# Altium PCB SPI-主板-开关.PcbDoc (part 8 of 11)
Units mm, origin at the board's own origin, x right, y up, seen from the top; angles counter-clockwise.
Board outline 97.69 x 103.45 mm, 2 copper layers (Top Layer, Bottom Layer); 86 components, 63 nets, 260 pads, 250 vias.
Unrouted connection lines stored in the file: 6.
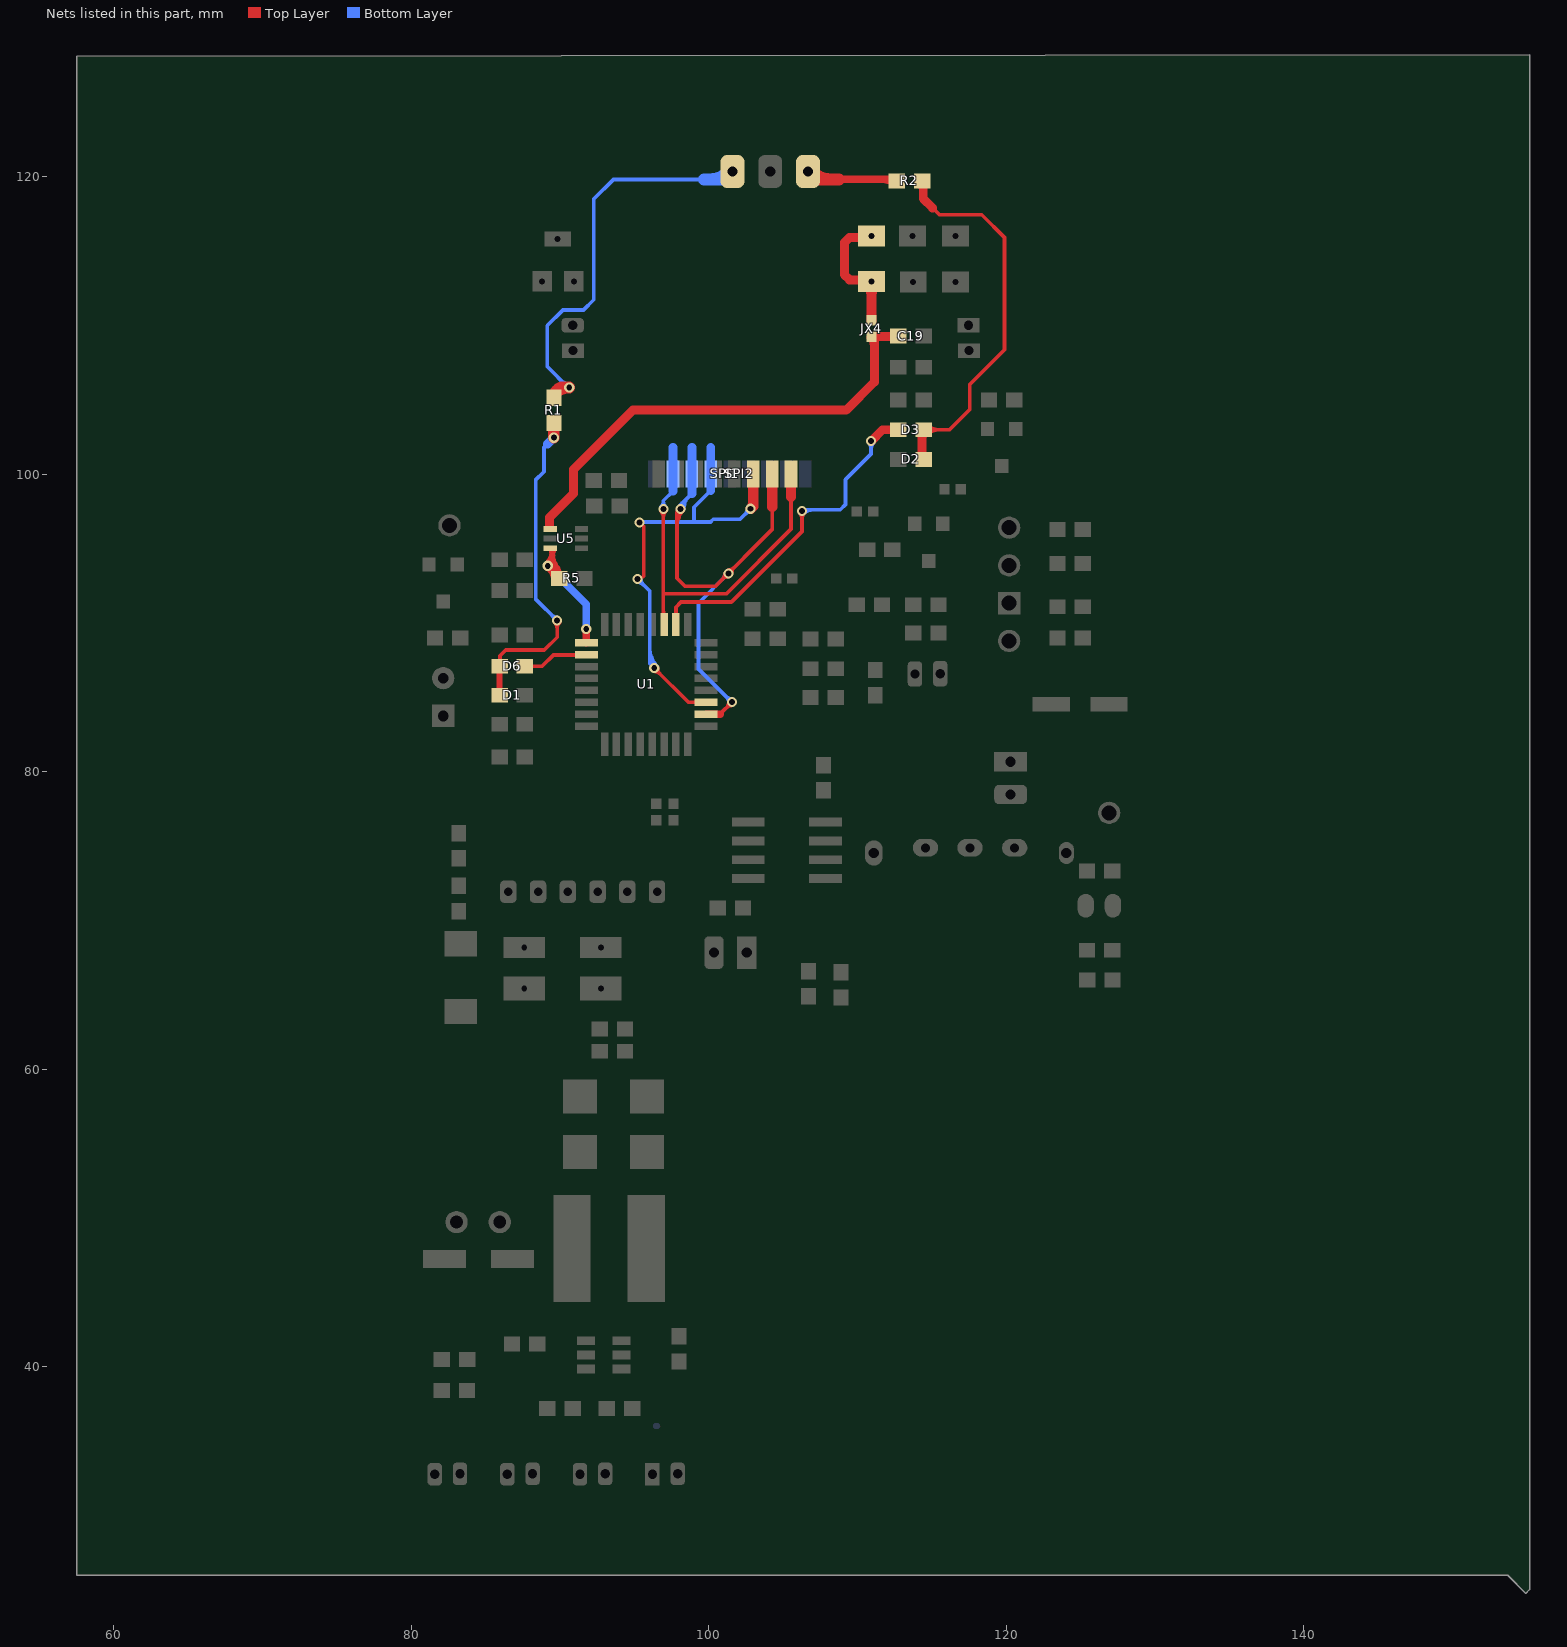
[diagram p8: the nets of this part, all layers, seen from the top]

## Via types
v1: diameter 0.9, hole 0.5, Top Layer to Bottom Layer, 104 vias
v2: diameter 0.68, hole 0.4, Top Layer to Bottom Layer, 100 vias
v3: diameter 1.1, hole 0.6, Top Layer to Bottom Layer, tented both sides, 16 vias
v4: diameter 1, hole 0.8, Top Layer to Bottom Layer, tented both sides, 8 vias
v5: diameter 1, hole 0.6, Top Layer to Bottom Layer, 4 vias
v6: diameter 0.8, hole 0.5, Top Layer to Bottom Layer, 4 vias
v7: diameter 0.7, hole 0.4, Top Layer to Bottom Layer, 4 vias
v8: diameter 0.6, hole 0.4, Top Layer to Bottom Layer, 3 vias
v9: diameter 1.1, hole 0.68, Top Layer to Bottom Layer, 2 vias
v10: diameter 0.8, hole 0.4, Top Layer to Bottom Layer, 2 vias
v11: diameter 1, hole 0.5, Top Layer to Bottom Layer, 1 vias
v12: diameter 0.9, hole 0.6, Top Layer to Bottom Layer, tented bottom, 1 vias
v13: diameter 1.2, hole 0.68, Top Layer to Bottom Layer, 1 vias

## Nets (pads, with @x,y where several pads share a name; then routed paths per layer and width w, separated by ;. In a path a pad name is that pad's centre, name@x,y a point inside that pad or via, vN(x,y) a via of type N, cw(c..) or ccw(c..) an arc to the next point about the centre after c; other vN are vias at no path point) (continued)
HWKZ: R5.2 U1.17 U5.6 | length 146.2
  Top Layer w0.254: v2@89.124,93.647 cw(c88.981,93.113) R5.2@89.46,93.389 ; v2@89.146,93.83 ccw(c89.618,94.154) 89.527,93.589 ; v2@89.194,93.64 cw(c89.206,93.452) 89.369,93.547 cw(c89.551,93.652) v2@89.367,93.752 ; v2@89.288,93.561 ccw(c89.693,93.84) R5.2@89.811,93.362 ; U5.6@89.35,95.032 U5.6@89.51,95.032 ; v2@89.371,93.76 ccw(c89.548,93.674) 89.45,93.504 ; v2@89.381,93.784 ccw(c89.663,93.688) R5.2@89.517,93.428 ; v2@89.383,93.789 ccw(c89.75,93.673) R5.2@89.5,93.379 ; v2@89.385,93.798 ccw(c89.844,93.675) R5.2@89.433,93.437 ; v2@89.392,93.872 ccw(c90.072,93.934) R5.2@89.731,93.342 ; R5.2@89.51,93.06 89.51,93.523 U5.6@89.51,95.032 ; R5.2@89.531,93.054 ccw(c88.953,93.139) 89.366,93.552 ccw(c89.809,93.995) R5.2@89.866,93.371 ; 89.538,93.566 cw(c89.345,93.152) R5.2@89.785,93.032 ; U5.6@89.55,94.991 cw(c89.367,94.855) 89.581,94.777 ; 89.561,93.538 cw(c89.325,93.13) R5.2@89.784,93.026 ; v2@89.041,94.015 ccw(c88.172,95.032) U5.6@89.51,95.032 ; v2@89.041,94.015 ccw(c88.172,95.032) U5.6@89.51,95.032 ; v2@89.041,94.015 ccw(c88.172,95.032) U5.6@89.51,95.032 ; v2@89.088,93.661 cw(c88.771,92.994) R5.2@89.51,92.994 ; v2@89.088,93.661 cw(c88.771,92.994) R5.2@89.51,92.994 ; v2@89.088,93.661 cw(c88.771,92.994) R5.2@89.51,92.994 ; v2@89.127,93.647 cw(c88.973,93.044) R5.2@89.574,93.205 ; v2@89.127,93.647 cw(c88.973,93.044) R5.2@89.574,93.205 ; v2@89.127,93.647 cw(c88.973,93.044) R5.2@89.574,93.205 ; v2@89.127,93.647 cw(c88.973,93.044) R5.2@89.574,93.205 ; v2@89.127,93.647 cw(c88.973,93.044) R5.2@89.574,93.205 ; v2@89.131,93.646 cw(c88.933,92.801) R5.2@89.684,93.235 ; v2@89.131,93.646 cw(c88.933,92.801) R5.2@89.684,93.235 ; v2@89.131,93.646 cw(c88.933,92.801) R5.2@89.684,93.235 ; v2@89.131,93.646 cw(c88.933,92.801) R5.2@89.684,93.235 ; v2@89.137,93.644 cw(c89.011,93.021) R5.2@89.625,93.185 ; v2@89.137,93.644 cw(c89.011,93.021) R5.2@89.625,93.185 ; v2@89.137,93.644 cw(c89.011,93.021) R5.2@89.625,93.185 ; v2@89.137,93.644 cw(c89.011,93.021) R5.2@89.625,93.185 ; v2@89.137,93.644 cw(c89.011,93.021) R5.2@89.625,93.185 ; v2@89.137,93.644 cw(c89.011,93.021) R5.2@89.625,93.185 ; v2@89.188,93.893 cw(c89.102,93.47) 89.519,93.582 ; v2@89.188,93.893 cw(c89.102,93.47) 89.519,93.582 ; v2@89.188,93.893 cw(c89.102,93.47) 89.519,93.582 ; v2@89.188,93.893 cw(c89.102,93.47) 89.519,93.582 ; v2@89.188,93.893 cw(c89.102,93.47) 89.519,93.582 ; v2@89.188,93.893 cw(c89.102,93.47) 89.519,93.582 ; v2@89.19,93.893 cw(c89.096,93.526) 89.462,93.624 ; v2@89.19,93.893 cw(c89.096,93.526) 89.462,93.624 ; v2@89.19,93.893 cw(c89.096,93.526) 89.462,93.624 ; v2@89.19,93.893 cw(c89.096,93.526) 89.462,93.624 ; v2@89.19,93.893 cw(c89.096,93.526) 89.462,93.624 ; v2@89.19,94.066 ccw(c89.205,94.385) 89.469,94.204 ; v2@89.19,94.066 ccw(c89.205,94.385) 89.469,94.204 ; v2@89.19,94.066 ccw(c89.205,94.385) 89.469,94.204 ; v2@89.192,93.892 cw(c88.916,93.013) R5.2@89.789,93.308 ; v2@89.192,93.892 cw(c88.916,93.013) R5.2@89.789,93.308 ; v2@89.192,93.892 cw(c88.916,93.013) R5.2@89.789,93.308 ; v2@89.192,93.892 cw(c88.916,93.013) R5.2@89.789,93.308 ; v2@89.192,93.892 cw(c88.916,93.013) R5.2@89.789,93.308 ; v2@89.192,93.892 cw(c88.916,93.013) R5.2@89.789,93.308 ; v2@89.197,93.89 cw(c88.962,93.395) R5.2@89.51,93.395 ; v2@89.197,93.89 cw(c88.962,93.395) R5.2@89.51,93.395 ; v2@89.197,93.89 cw(c88.962,93.395) R5.2@89.51,93.395 ; v2@89.2,93.889 cw(c88.809,93.212) R5.2@89.564,93.414 ; v2@89.2,93.889 cw(c88.809,93.212) R5.2@89.564,93.414 ; v2@89.2,93.889 cw(c88.809,93.212) R5.2@89.564,93.414 ; v2@89.2,93.889 cw(c88.885,93.343) 89.494,93.506 ; v2@89.2,93.889 cw(c88.809,93.212) R5.2@89.564,93.414 ; v2@89.2,93.889 cw(c88.809,93.212) R5.2@89.564,93.414 ; v2@89.2,93.889 cw(c88.885,93.343) 89.494,93.506 ; v2@89.2,93.889 cw(c88.809,93.212) R5.2@89.564,93.414 ; v2@89.2,93.889 cw(c88.885,93.343) 89.494,93.506 ; v2@89.2,93.889 cw(c88.885,93.343) 89.494,93.506 ; v2@89.2,93.889 cw(c88.885,93.343) 89.494,93.506 ; v2@89.201,93.641 cw(c89.26,93.067) R5.2@89.669,93.475 ; v2@89.201,93.641 cw(c89.26,93.067) R5.2@89.669,93.475 ; v2@89.201,93.641 cw(c89.26,93.067) R5.2@89.669,93.475 ; v2@89.201,93.641 cw(c89.26,93.067) R5.2@89.669,93.475 ; v2@89.201,93.641 cw(c89.26,93.067) R5.2@89.669,93.475 ; v2@89.206,93.822 ccw(c88.643,94.481) 89.51,94.481 ; v2@89.206,93.822 ccw(c88.643,94.481) 89.51,94.481 ; v2@89.206,93.822 ccw(c88.643,94.481) 89.51,94.481 ; v2@89.254,93.653 cw(c89.33,93.447) 89.486,93.603 ; v2@89.254,93.653 cw(c89.33,93.447) 89.486,93.603 ; v2@89.254,93.653 cw(c89.33,93.447) 89.486,93.603 ; v2@89.254,93.653 cw(c89.33,93.447) 89.486,93.603 ; v2@89.268,94.134 cw(c89.101,93.603) 89.628,93.782 ; v2@89.268,94.134 cw(c89.101,93.603) 89.628,93.782 ; v2@89.268,94.134 cw(c89.101,93.603) 89.628,93.782 ; v2@89.268,94.134 cw(c89.101,93.603) 89.628,93.782 ; v2@89.268,94.134 cw(c89.101,93.603) 89.628,93.782 ; v2@89.268,94.134 cw(c89.101,93.603) 89.628,93.782 ; v2@89.274,93.662 cw(c89.412,93.384) 89.579,93.646 ; v2@89.274,93.662 cw(c89.412,93.384) 89.579,93.646 ; v2@89.274,93.662 cw(c89.412,93.384) 89.579,93.646 ; v2@89.274,93.662 cw(c89.412,93.384) 89.579,93.646 ; U5.6@89.302,94.984 cw(c89.039,94.718) 89.4,94.622 ; U5.6@89.302,94.984 cw(c89.039,94.718) 89.4,94.622 ; U5.6@89.302,94.984 cw(c89.039,94.718) 89.4,94.622 ; v2@89.337,93.806 ccw(c90.122,94.259) R5.2@89.965,93.367 ; v2@89.337,93.806 ccw(c90.122,94.259) R5.2@89.965,93.367 ; v2@89.337,93.806 ccw(c90.122,94.259) R5.2@89.965,93.367 ; v2@89.337,93.806 ccw(c90.122,94.259) R5.2@89.965,93.367 ; v2@89.357,93.735 ccw(c89.573,93.59) R5.2@89.404,93.391 ; v2@89.357,93.735 ccw(c89.573,93.59) R5.2@89.404,93.391 ; v2@89.357,93.735 ccw(c89.573,93.59) R5.2@89.404,93.391 ; v2@89.365,93.958 cw(c89.825,94.22) 89.388,94.52 ; v2@89.365,93.958 cw(c89.825,94.22) 89.388,94.52 ; v2@89.365,93.958 cw(c89.825,94.22) 89.388,94.52 ; v2@89.387,93.899 ccw(c89.757,93.982) 89.554,93.662 ; v2@89.387,93.899 ccw(c89.757,93.982) 89.554,93.662 ; v2@89.387,93.899 ccw(c89.757,93.982) 89.554,93.662 ; v2@89.387,93.899 ccw(c89.757,93.982) 89.554,93.662 ; v2@89.389,93.892 cw(c89.761,93.961) 89.449,94.176 ; v2@89.389,93.892 cw(c89.761,93.961) 89.449,94.176 ; v2@89.389,93.892 cw(c89.761,93.961) 89.449,94.176 ; v2@89.392,93.844 ccw(c89.713,93.829) 89.486,93.603 ; v2@89.392,93.844 ccw(c89.713,93.829) 89.486,93.603 ; v2@89.392,93.844 ccw(c89.713,93.829) 89.486,93.603 ; v2@89.392,93.844 ccw(c89.713,93.829) 89.486,93.603 ; v2@89.439,93.658 ccw(c90.214,93.866) R5.2@89.941,93.112 ; v2@89.439,93.658 ccw(c90.214,93.866) R5.2@89.941,93.112 ; v2@89.439,93.658 ccw(c90.214,93.866) R5.2@89.941,93.112 ; 89.478,93.562 cw(c88.947,93.255) R5.2@89.54,93.097 ; 89.478,93.562 cw(c88.947,93.255) R5.2@89.54,93.097 ; 89.478,93.562 cw(c88.947,93.255) R5.2@89.54,93.097 ; 89.478,93.562 cw(c88.947,93.255) R5.2@89.54,93.097 ; 89.51,93.617 ccw(c90.517,93.617) R5.2@89.805,92.905 ; 89.51,93.617 ccw(c90.517,93.617) R5.2@89.805,92.905 ; 89.51,93.617 ccw(c90.517,93.617) R5.2@89.805,92.905 ; 89.51,94.23 ccw(c91.13,94.23) R5.2@89.984,93.084 ; 89.51,94.23 ccw(c91.13,94.23) R5.2@89.984,93.084 ; 89.51,94.23 ccw(c91.13,94.23) R5.2@89.984,93.084 ; 89.51,94.638 cw(c89.998,94.638) U5.6@89.653,94.984 ; 89.51,94.638 cw(c89.998,94.638) U5.6@89.653,94.984 ; 89.51,94.638 cw(c89.998,94.638) U5.6@89.653,94.984 ; U5.6@89.51,94.843 ccw(c91.743,94.843) R5.2@90.164,93.264 ; U5.6@89.51,94.843 ccw(c91.743,94.843) R5.2@90.164,93.264 ; U5.6@89.51,94.843 ccw(c91.743,94.843) R5.2@90.164,93.264 ; 89.542,93.678 cw(c89.129,93.402) R5.2@89.569,93.172 ; 89.542,93.678 cw(c89.129,93.402) R5.2@89.569,93.172 ; 89.542,93.678 cw(c89.129,93.402) R5.2@89.569,93.172 ; 89.542,93.678 cw(c89.129,93.402) R5.2@89.569,93.172 ; 89.545,94.798 ccw(c89.371,94.898) U5.6@89.546,94.998 ; 89.545,94.798 ccw(c89.371,94.898) U5.6@89.546,94.998 ; 89.545,94.798 ccw(c89.371,94.898) U5.6@89.546,94.998 ; 89.561,94.549 cw(c90.147,94.651) U5.6@89.66,94.993 ; 89.561,94.549 cw(c90.147,94.651) U5.6@89.66,94.993 ; 89.561,94.549 cw(c90.147,94.651) U5.6@89.66,94.993 ; 89.571,93.635 ccw(c90.097,93.987) R5.2@89.973,93.366 ; 89.571,93.635 ccw(c90.097,93.987) R5.2@89.973,93.366 ; 89.571,93.635 ccw(c90.097,93.987) R5.2@89.973,93.366 ; 89.571,93.635 ccw(c90.097,93.987) R5.2@89.973,93.366 ; R5.2@89.586,93.201 ccw(c89.137,93.487) 89.598,93.753 ; R5.2@89.586,93.201 ccw(c89.137,93.487) 89.598,93.753 ; R5.2@89.586,93.201 ccw(c89.137,93.487) 89.598,93.753 ; R5.2@89.627,93.255 ccw(c89.16,93.691) 89.708,94.021 ; R5.2@89.627,93.255 ccw(c89.16,93.691) 89.708,94.021 ; R5.2@89.627,93.255 ccw(c89.16,93.691) 89.708,94.021 ; 89.688,93.597 ccw(c90.128,93.851) R5.2@89.997,93.36 ; 89.688,93.597 ccw(c90.128,93.851) R5.2@89.997,93.36 ; 89.688,93.597 ccw(c90.128,93.851) R5.2@89.997,93.36 ; R5.2@89.813,93.081 ccw(c89.416,93.452) 89.881,93.732 ; R5.2@89.813,93.081 ccw(c89.416,93.452) 89.881,93.732 ; R5.2@89.813,93.081 ccw(c89.416,93.452) 89.881,93.732
  Top Layer w0.5: v2@89.154,93.853 v2(89.179,93.853) 89.51,93.523 ; R5.2@89.95,93 89.95,93.082 89.51,93.523 ; v2(91.77,89.611) U1.17@91.775,88.677 ; v2@89.156,93.766 cw(c88.993,93.158) R5.2@89.539,93.473 ; v2@89.156,93.766 cw(c88.993,93.158) R5.2@89.539,93.473 ; v2@89.156,93.766 cw(c89.035,93.314) 89.44,93.548 ; v2@89.156,93.766 cw(c88.993,93.158) R5.2@89.539,93.473 ; v2@89.156,93.766 cw(c88.993,93.158) R5.2@89.539,93.473 ; v2@89.156,93.766 cw(c88.993,93.158) R5.2@89.539,93.473 ; v2@89.156,93.766 cw(c88.993,93.158) R5.2@89.539,93.473 ; v2@89.156,93.766 cw(c89.035,93.314) 89.44,93.548 ; v2@89.156,93.766 cw(c88.993,93.158) R5.2@89.539,93.473 ; v2@89.156,93.766 cw(c88.993,93.158) R5.2@89.539,93.473 ; v2@89.156,93.766 cw(c88.993,93.158) R5.2@89.539,93.473 ; v2@89.156,93.766 cw(c88.993,93.158) R5.2@89.539,93.473 ; v2@89.156,93.766 cw(c89.035,93.314) 89.44,93.548 ; v2@89.156,93.766 cw(c88.993,93.158) R5.2@89.539,93.473 ; v2@89.156,93.766 cw(c88.993,93.158) R5.2@89.539,93.473 ; v2@89.156,93.766 cw(c89.04,93.331) 89.429,93.556 ; v2@89.156,93.766 cw(c89.04,93.331) 89.429,93.556 ; v2@89.156,93.766 cw(c89.04,93.331) 89.429,93.556 ; v2@89.156,93.766 cw(c89.04,93.331) 89.429,93.556 ; v2@89.156,93.766 cw(c88.993,93.158) R5.2@89.539,93.473 ; v2@89.156,93.766 cw(c88.993,93.158) R5.2@89.539,93.473 ; v2@89.156,93.766 cw(c89.035,93.314) 89.44,93.548 ; v2@89.156,93.766 cw(c88.993,93.158) R5.2@89.539,93.473 ; v2@89.156,93.766 cw(c88.993,93.158) R5.2@89.539,93.473 ; v2@89.156,93.766 cw(c88.993,93.158) R5.2@89.539,93.473 ; v2@89.156,93.766 cw(c88.993,93.158) R5.2@89.539,93.473 ; v2@89.156,93.766 cw(c89.035,93.314) 89.44,93.548 ; v2@89.156,93.766 cw(c88.993,93.158) R5.2@89.539,93.473 ; v2@89.156,93.766 cw(c88.993,93.158) R5.2@89.539,93.473 ; v2@89.156,93.766 cw(c89.04,93.331) 89.429,93.556 ; v2@89.156,93.766 cw(c89.04,93.331) 89.429,93.556 ; v2@89.156,93.766 cw(c89.04,93.331) 89.429,93.556 ; v2@89.156,93.766 cw(c89.04,93.331) 89.429,93.556 ; v2@89.156,93.766 cw(c88.993,93.158) R5.2@89.539,93.473 ; v2@89.156,93.766 cw(c88.993,93.158) R5.2@89.539,93.473 ; v2@89.156,93.766 cw(c89.035,93.314) 89.44,93.548 ; v2@89.156,93.766 cw(c88.993,93.158) R5.2@89.539,93.473 ; v2@89.156,93.766 cw(c88.993,93.158) R5.2@89.539,93.473 ; v2@89.156,93.766 cw(c89.04,93.331) 89.429,93.556 ; v2@89.156,93.766 cw(c89.04,93.331) 89.429,93.556 ; v2@89.156,93.766 cw(c89.04,93.331) 89.429,93.556 ; v2@89.156,93.766 cw(c89.04,93.331) 89.429,93.556 ; v2@89.156,93.766 cw(c89.04,93.331) 89.429,93.556 ; v2@89.156,93.766 cw(c89.04,93.331) 89.429,93.556 ; v2@89.156,93.766 cw(c89.04,93.331) 89.429,93.556 ; v2@89.156,93.766 cw(c89.04,93.331) 89.429,93.556 ; v2@89.156,93.766 cw(c89.04,93.331) 89.429,93.556 ; v2@89.156,93.766 cw(c89.04,93.331) 89.429,93.556 ; v2@89.156,93.766 cw(c89.04,93.331) 89.429,93.556 ; v2@89.156,93.766 cw(c89.04,93.331) 89.429,93.556 ; v2@89.267,93.872 ccw(c89.707,93.967) 89.482,93.578 ; v2@89.267,93.872 ccw(c89.707,93.967) 89.482,93.578 ; v2@89.267,93.872 ccw(c89.707,93.967) 89.482,93.578 ; v2@89.267,93.872 ccw(c89.707,93.967) 89.482,93.578 ; v2@89.267,93.872 ccw(c89.707,93.967) 89.482,93.578 ; v2@89.267,93.872 ccw(c89.707,93.967) 89.482,93.578 ; v2@89.267,93.872 ccw(c89.707,93.967) 89.482,93.578 ; v2@89.267,93.872 ccw(c89.707,93.967) 89.482,93.578 ; v2@89.267,93.872 ccw(c89.707,93.967) 89.482,93.578 ; v2@89.267,93.872 ccw(c89.707,93.967) 89.482,93.578 ; v2@89.267,93.872 ccw(c89.707,93.967) 89.482,93.578 ; v2@89.267,93.872 ccw(c89.707,93.967) 89.482,93.578 ; v2@89.267,93.872 ccw(c89.707,93.967) 89.482,93.578 ; v2@89.267,93.872 ccw(c89.707,93.967) 89.482,93.578 ; v2@89.267,93.872 ccw(c89.707,93.967) 89.482,93.578 ; v2@89.267,93.872 ccw(c89.707,93.967) 89.482,93.578 ; v2@89.38,93.653 cw(c88.727,93) R5.2@89.65,93 ; v2@89.38,93.653 cw(c88.727,93) R5.2@89.65,93 ; v2@89.38,93.653 cw(c88.727,93) R5.2@89.65,93 ; v2@89.395,93.617 cw(c88.778,93) R5.2@89.65,93 ; v2@89.395,93.617 cw(c88.778,93) R5.2@89.65,93 ; v2@89.395,93.617 cw(c88.778,93) R5.2@89.65,93 ; v2@89.395,93.617 cw(c88.778,93) R5.2@89.65,93 ; v2@89.395,93.617 cw(c88.778,93) R5.2@89.65,93 ; v2@89.395,93.617 cw(c88.778,93) R5.2@89.65,93 ; v2@89.395,93.617 cw(c88.778,93) R5.2@89.65,93 ; v2@89.395,93.617 cw(c88.778,93) R5.2@89.65,93 ; v2@89.395,93.617 cw(c88.778,93) R5.2@89.65,93 ; v2@89.395,93.617 cw(c88.778,93) R5.2@89.65,93 ; v2@89.395,93.617 cw(c88.778,93) R5.2@89.65,93 ; v2@89.395,93.617 cw(c88.778,93) R5.2@89.65,93 ; v2@89.395,93.617 cw(c88.778,93) R5.2@89.65,93 ; v2@89.395,93.617 cw(c88.778,93) R5.2@89.65,93 ; v2@89.395,93.617 cw(c88.778,93) R5.2@89.65,93 ; v2@89.395,93.617 cw(c88.778,93) R5.2@89.65,93 ; 89.51,93.523 cw(c89.136,93.149) R5.2@89.655,93.048 ; 89.51,93.523 cw(c89.136,93.149) R5.2@89.655,93.048 ; 89.51,93.523 cw(c89.136,93.149) R5.2@89.655,93.048 ; 89.51,93.523 cw(c89.136,93.149) R5.2@89.655,93.048 ; 89.51,93.523 cw(c89.136,93.149) R5.2@89.655,93.048 ; 89.51,93.523 cw(c89.136,93.149) R5.2@89.655,93.048
  Bottom Layer w0.5: v2(89.179,93.853) 91.77,91.262 v2(91.77,89.611)
HWPOW: C19.2 JX4.1 JX4.2 pad.0@110.95,112.956 pad.0@110.95,116.032 U5.4 | length 47.8
  Top Layer w0.6: U5.4@89.306,96.443 89.306,97.104 90.907,98.704 90.907,100.32 94.904,104.318 109.245,104.318 111.136,106.209 111.136,109.271 C19.2@112.75,109.271 ; pad.0@110.95,112.956 110.837,113.069 109.478,113.069 109.124,113.423 109.124,115.583 109.478,115.937 110.855,115.937 pad.0@110.95,116.032 ; JX4.1@110.912,109.214 cw(c110.37,108.673) 111.136,108.673 ; JX4.1@110.912,109.214 cw(c110.37,108.673) 111.136,108.673 ; JX4.1@110.912,109.214 cw(c110.37,108.673) 111.136,108.673 ; 112.147,109.271 ccw(c112.147,109.853) C19.2@112.559,109.441 ; 112.147,109.271 ccw(c112.147,109.853) C19.2@112.559,109.441 ; 112.147,109.271 ccw(c112.147,109.853) C19.2@112.559,109.441
  Top Layer w0.7: JX4.2@110.95,110.35 pad.0@110.95,112.956 ; pad.0@110.703,112.708 cw(c110.105,112.111) 110.95,112.111 ; pad.0@110.703,112.708 cw(c110.105,112.111) 110.95,112.111 ; pad.0@110.703,112.708 cw(c110.105,112.111) 110.95,112.111 ; 110.95,112.111 cw(c111.795,112.111) pad.0@111.197,112.708 ; 110.95,112.111 cw(c111.795,112.111) pad.0@111.197,112.708 ; 110.95,112.111 cw(c111.795,112.111) pad.0@111.197,112.708
IRQ: SPI1.1 SPI2.1 U1.11 | length 31.4
  Top Layer w0.254: U1.11@96.952,89.902 v2(96.952,97.663) ; 96.952,91.973 101.194,91.973 105.537,96.317 105.537,98.501 ; v2@96.801,97.512 cw(c96.438,97.149) 96.952,97.149 ; v2@96.801,97.512 cw(c96.438,97.149) 96.952,97.149 ; v2@96.801,97.512 cw(c96.438,97.149) 96.952,97.149 ; 96.952,90.841 ccw(c97.413,90.841) U1.11@97.087,90.514 ; 96.952,90.841 ccw(c97.413,90.841) U1.11@97.087,90.514 ; 96.952,90.841 ccw(c97.413,90.841) U1.11@97.087,90.514 ; 96.952,97.149 cw(c97.466,97.149) v2@97.102,97.512 ; 96.952,97.149 cw(c97.466,97.149) v2@97.102,97.512 ; 96.952,97.149 cw(c97.466,97.149) v2@97.102,97.512
  Top Layer w0.7: 105.537,98.501 SPI1.1@105.537,100.032
  Bottom Layer w0.254: v2(96.952,97.663) 96.952,98.222 97.6,98.87 ; 96.952,98.177 ccw(c97.466,98.177) 97.102,97.814 cw(c97.466,98.177) 96.952,98.177 ; 96.952,98.177 cw(c96.438,98.177) 96.801,97.814 ccw(c96.438,98.177) 96.952,98.177
  Bottom Layer w0.6: 97.6,98.87 97.6,101.803
L-G: pad.0@101.6,120.36 R1.1 | length 56.7
  Top Layer w0.254: pad.0@101.405,119.558 101.295,119.558 101.295,119.832 pad.0@101.6,119.832
  Top Layer w0.8: 90.202,105.848 90.195,105.842 ; R1.1@89.673,105.431 cw(c90.627,104.527) v2(90.627,105.842) ; R1.1@89.673,105.431 cw(c90.627,104.527) v2(90.627,105.842) ; R1.1@89.673,105.431 cw(c90.627,104.527) v2(90.627,105.842) ; R1.1@89.696,105.471 cw(c90.195,105.32) 90.195,105.842 ; R1.1@89.696,105.471 cw(c90.195,105.32) 90.195,105.842 ; R1.1@89.696,105.471 cw(c90.195,105.32) 90.195,105.842 ; 90.195,105.842 v2(90.627,105.842)
  Bottom Layer w0.254: v2(90.627,105.842) 90.551,105.842 89.145,107.248 89.145,109.998 90.195,111.049 91.592,111.049 92.278,111.735 92.278,118.516 93.594,119.832 101.468,119.832 pad.0@101.93,120.294 ; 90.134,106.259 ccw(c90.627,106.753) v2@90.627,106.055 ; 90.134,106.259 ccw(c90.627,106.753) v2@90.627,106.055 ; 90.134,106.259 ccw(c90.627,106.753) v2@90.627,106.055 ; 90.317,106.075 cw(c90.084,105.842) v2@90.414,105.842 ; 90.317,106.075 cw(c90.084,105.842) v2@90.414,105.842 ; 90.317,106.075 cw(c90.084,105.842) v2@90.414,105.842 ; 90.387,106.119 cw(c90.282,105.729) v2@90.666,105.855 ; 90.387,106.119 cw(c90.282,105.729) v2@90.666,105.855 ; 90.387,106.119 cw(c90.282,105.729) v2@90.666,105.855 ; 99.424,119.832 ccw(c99.424,122.186) pad.0@101.089,120.521 ; 99.424,119.832 ccw(c99.424,122.186) pad.0@101.089,120.521 ; 99.424,119.832 ccw(c99.424,122.186) pad.0@101.089,120.521 ; 100.038,119.832 ccw(c100.038,121.572) pad.0@101.268,120.342 ; 100.038,119.832 ccw(c100.038,121.572) pad.0@101.268,120.342 ; 100.038,119.832 ccw(c100.038,121.572) pad.0@101.268,120.342 ; 100.285,119.832 cw(c100.285,118.695) pad.0@101.089,119.499 ; 100.285,119.832 cw(c100.285,118.695) pad.0@101.089,119.499 ; 100.285,119.832 cw(c100.285,118.695) pad.0@101.089,119.499 ; 100.651,119.832 ccw(c100.651,120.959) pad.0@101.448,120.162 ; 100.651,119.832 ccw(c100.651,120.959) pad.0@101.448,120.162 ; 100.651,119.832 ccw(c100.651,120.959) pad.0@101.448,120.162
  Bottom Layer w0.8: 99.695,119.832 pad.0@101.6,119.832 ; 100.083,119.832 ccw(c100.083,121.527) pad.0@101.282,120.328 ; 100.083,119.832 ccw(c100.083,121.527) pad.0@101.282,120.328 ; 100.083,119.832 ccw(c100.083,121.527) pad.0@101.282,120.328
L-G-D: D6.2 U1.18 | length 4.4
  Top Layer w0.254: D6.2@87.642,87.1 88.802,87.1 89.56,87.859 U1.18@91.75,87.859
L-R: D2.1 D3.1 R2.2 | length 32
  Top Layer w0.254: D3.1@114.35,103 116.183,103 117.551,104.369 117.551,106.045 119.888,108.382 119.888,115.926 118.364,117.45 115.519,117.45 115.062,117.907 ; D3.1@114.764,102.736 cw(c115.4,102.099) 115.4,103 cw(c115.4,103.9) D3.1@114.764,103.264
  Top Layer w0.6: R2.2@114.236,119.732 114.427,119.54 114.427,118.542 115.062,117.907 ; D2.1@114.35,101 D3.1@114.35,103 ; R2.2@114.259,119.59 cw(c113.852,119.184) 114.427,119.184 ; R2.2@114.259,119.59 cw(c113.852,119.184) 114.427,119.184 ; R2.2@114.259,119.59 cw(c113.852,119.184) 114.427,119.184 ; 114.35,101.604 ccw(c115.004,101.604) D2.1@114.541,101.141 ; 114.35,101.604 ccw(c115.004,101.604) D2.1@114.541,101.141 ; 114.35,101.604 ccw(c115.004,101.604) D2.1@114.541,101.141 ; 114.35,102.396 cw(c115.004,102.396) D3.1@114.541,102.859 ; 114.35,102.396 cw(c115.004,102.396) D3.1@114.541,102.859 ; 114.35,102.396 cw(c115.004,102.396) D3.1@114.541,102.859
L-R-D: D3.2 U1.10 | length 31.5
  Top Layer w0.254: U1.10@97.8,89.902 97.8,91.069 98.146,91.415 101.524,91.415 106.274,96.164 v2(106.274,97.536) ; U1.10@97.713,90.514 ccw(c97.503,90.724) 97.8,90.724 ; U1.10@97.713,90.514 ccw(c97.503,90.724) 97.8,90.724 ; U1.10@97.713,90.514 ccw(c97.503,90.724) 97.8,90.724 ; 97.8,90.724 ccw(c98.097,90.724) U1.10@97.887,90.514 ; 97.8,90.724 ccw(c98.097,90.724) U1.10@97.887,90.514 ; 97.8,90.724 ccw(c98.097,90.724) U1.10@97.887,90.514 ; v2@106.123,97.385 cw(c105.759,97.022) 106.274,97.022 ; v2@106.123,97.385 cw(c105.759,97.022) 106.274,97.022 ; v2@106.123,97.385 cw(c105.759,97.022) 106.274,97.022 ; 106.274,97.022 cw(c106.788,97.022) v2@106.424,97.385 ; 106.274,97.022 cw(c106.788,97.022) v2@106.424,97.385 ; 106.274,97.022 cw(c106.788,97.022) v2@106.424,97.385
  Top Layer w0.6: v2(110.922,102.235) 111.687,103 D3.2@112.75,103
  Bottom Layer w0.254: v2(106.274,97.536) 106.36,97.622 107.05,97.622 107.052,97.62 107.782,97.62 107.783,97.622 108.849,97.622 109.195,97.968 109.195,99.644 110.922,101.371 v2(110.922,102.235) ; v2@106.424,97.385 cw(c106.995,96.814) 106.995,97.622 ; v2@106.424,97.385 cw(c106.995,96.814) 106.995,97.622 ; v2@106.424,97.385 cw(c106.995,96.814) 106.995,97.622 ; v2@110.771,102.084 cw(c110.408,101.721) 110.922,101.721 ; v2@110.771,102.084 cw(c110.408,101.721) 110.922,101.721 ; v2@110.771,102.084 cw(c110.408,101.721) 110.922,101.721 ; 110.922,101.721 cw(c111.436,101.721) v2@111.072,102.084 ; 110.922,101.721 cw(c111.436,101.721) v2@111.072,102.084 ; 110.922,101.721 cw(c111.436,101.721) v2@111.072,102.084
LED-G: D1.1 D6.1 R1.2 | length 26.6
  Top Layer w0.254: D6.1@85.979,87.097 85.979,87.808 86.36,88.189 88.951,88.189 89.814,89.052 v2(89.814,90.17) ; v2@89.664,90.019 cw(c89.3,89.656) 89.814,89.656 ; v2@89.664,90.019 cw(c89.3,89.656) 89.814,89.656 ; v2@89.664,90.019 cw(c89.3,89.656) 89.814,89.656 ; 89.814,89.656 cw(c90.329,89.656) v2@89.965,90.019 ; 89.814,89.656 cw(c90.329,89.656) v2@89.965,90.019 ; 89.814,89.656 cw(c90.329,89.656) v2@89.965,90.019
  Top Layer w0.4: D1.1@85.942,85.15 D6.1@85.942,87.1
  Top Layer w0.8: v2(89.586,102.464) R1.2@89.586,103.45
  Bottom Layer w0.254: 89.154,102.032 88.925,101.803 88.925,100.178 88.367,99.619 88.367,91.618 v2(89.814,90.17) ; 89.451,90.534 ccw(c89.814,90.897) 89.814,90.383 cw(c89.814,90.897) 89.451,90.534 ; 89.451,90.534 cw(c89.087,90.17) 89.601,90.17 ccw(c89.087,90.17) 89.451,90.534
  Bottom Layer w0.6: 89.154,102.032 v2(89.586,102.464)
LED-R: pad.0@106.68,120.36 R2.1 | length 12.9
  Top Layer w0.254: pad.0@106.68,119.832 106.68,119.609 pad.0@106.883,119.609 ; R2.1@112.536,119.507 R2.1@112.536,119.732
  Top Layer w0.5: 108.763,119.832 112.451,119.832 112.536,119.747 R2.1@112.536,119.507 ; 111.755,119.832 cw(c111.755,118.887) R2.1@112.423,119.555 ; 111.755,119.832 cw(c111.755,118.887) R2.1@112.423,119.555 ; 111.755,119.832 cw(c111.755,118.887) R2.1@112.423,119.555
  Top Layer w0.6: pad.0@106.883,119.609 pad.0@107.106,119.832
  Top Layer w0.8: pad.0@107.106,119.832 108.763,119.832 ; pad.0@106.998,120.328 ccw(c108.197,121.527) 108.197,119.832 ; pad.0@106.998,120.328 ccw(c108.197,121.527) 108.197,119.832 ; pad.0@106.998,120.328 ccw(c108.197,121.527) 108.197,119.832
MISO: SPI1.2 SPI2.2 U1.2 | length 57.3
  Top Layer w0.254: v2(98.095,97.663) 97.866,97.434 97.866,93.015 98.4,92.481 100.457,92.481 104.267,96.291 104.267,97.815 ; 100.768,83.877 v2(101.575,84.684) ; 97.866,96.597 cw(c99.161,96.597) v2@98.245,97.512 ; 97.866,96.597 cw(c99.161,96.597) v2@98.245,97.512 ; 97.866,96.597 cw(c99.161,96.597) v2@98.245,97.512 ; 97.866,97.21 cw(c98.548,97.21) v2@98.066,97.692 ; 97.866,97.21 cw(c98.548,97.21) v2@98.066,97.692 ; 97.866,97.21 cw(c98.548,97.21) v2@98.066,97.692 ; 97.878,97.367 ccw(c97.655,97.496) v2@97.896,97.587 ; 97.878,97.367 cw(c98.031,97.278) v2@98.06,97.453 ; 97.878,97.367 ccw(c97.655,97.496) v2@97.896,97.587 ; 97.878,97.367 cw(c98.031,97.278) v2@98.06,97.453 ; 97.878,97.367 ccw(c97.655,97.496) v2@97.896,97.587 ; 97.878,97.367 cw(c98.031,97.278) v2@98.06,97.453 ; v2@97.93,97.528 cw(c97.592,97.253) 97.97,97.035 ; v2@97.93,97.528 cw(c97.592,97.253) 97.97,97.035 ; v2@97.93,97.528 cw(c97.592,97.253) 97.97,97.035 ; 100.957,92.981 ccw(c100.593,93.345) v2@101.108,93.345 ; 100.957,92.981 cw(c101.321,92.618) v2@101.321,93.132 ; 100.957,92.981 ccw(c100.593,93.345) v2@101.108,93.345 ; 100.957,92.981 cw(c101.321,92.618) v2@101.321,93.132 ; 100.957,92.981 ccw(c100.593,93.345) v2@101.108,93.345 ; 100.957,92.981 cw(c101.321,92.618) v2@101.321,93.132 ; 101.211,84.32 ccw(c100.847,84.684) v2@101.362,84.684 ; 101.211,84.32 cw(c101.575,83.956) v2@101.575,84.471 ; 101.211,84.32 ccw(c100.847,84.684) v2@101.362,84.684 ; 101.211,84.32 cw(c101.575,83.956) v2@101.575,84.471 ; 101.211,84.32 ccw(c100.847,84.684) v2@101.362,84.684 ; 101.211,84.32 cw(c101.575,83.956) v2@101.575,84.471 ; v2@101.321,93.558 ccw(c101.321,94.072) 101.684,93.709 ; v2@101.321,93.558 ccw(c101.321,94.072) 101.684,93.709 ; v2@101.321,93.558 ccw(c101.321,94.072) 101.684,93.709 ; v2@101.534,93.345 cw(c102.048,93.345) 101.684,93.709 ; v2@101.534,93.345 cw(c102.048,93.345) 101.684,93.709 ; v2@101.534,93.345 cw(c102.048,93.345) 101.684,93.709
  Top Layer w0.5: U1.2@99.825,83.877 100.768,83.877
  Top Layer w0.7: 104.267,97.815 SPI1.2@104.267,100.032
  Bottom Layer w0.254: v2(98.095,97.663) 98.095,97.942 98.87,98.718 ; v2(101.321,93.345) 99.314,91.338 99.314,86.904 v2@101.56,84.658 ; v2@98.054,97.663 cw(c98.629,97.663) 98.222,98.07 ; v2@98.054,97.663 cw(c98.629,97.663) 98.222,98.07 ; v2@98.054,97.663 cw(c98.629,97.663) 98.222,98.07 ; v2@98.115,97.627 ccw(c97.814,98.15) 98.396,97.994 ; v2@98.115,97.627 ccw(c97.814,98.15) 98.396,97.994 ; v2@98.115,97.627 ccw(c97.814,98.15) 98.396,97.994 ; v2@98.308,97.663 cw(c99.497,97.663) 98.656,98.504 ; v2@98.308,97.663 cw(c99.497,97.663) 98.656,98.504 ; v2@98.308,97.663 cw(c99.497,97.663) 98.656,98.504 ; 100.957,92.981 ccw(c100.593,93.345) 101.108,93.345 cw(c100.593,93.345) 100.957,92.981 ; 100.957,92.981 cw(c101.321,92.618) 101.321,93.132 ccw(c101.321,92.618) 100.957,92.981 ; 101.142,85.076 ccw(c101.575,85.508) 101.575,84.897 cw(c101.575,85.508) 101.142,85.076 ; 101.239,84.979 cw(c100.944,84.684) 101.362,84.684 ccw(c100.944,84.684) 101.239,84.979
  Bottom Layer w0.6: 98.87,98.718 98.87,101.803
MOSI: SPI1.3 SPI2.3 U1.3 | length 43.3
  Top Layer w0.254: v2(95.352,96.774) 95.631,96.495 95.631,93.157 95.585,93.112 ; v2@96.342,86.757 cw(c96.342,86.242) 96.706,86.606 cw(c97.069,86.97) v2@96.555,86.97 ; v2(96.342,86.97) 98.634,84.677 U1.3@99.825,84.677 ; 99.003,84.677 ccw(c99.003,84.974) U1.3@99.213,84.764 ; 99.003,84.677 cw(c99.003,84.38) U1.3@99.213,84.59 ; 99.003,84.677 ccw(c99.003,84.974) U1.3@99.213,84.764 ; 99.003,84.677 cw(c99.003,84.38) U1.3@99.213,84.59 ; 99.003,84.677 ccw(c99.003,84.974) U1.3@99.213,84.764 ; 99.003,84.677 cw(c99.003,84.38) U1.3@99.213,84.59
  Top Layer w0.7: v2(102.819,97.688) v2@102.997,97.866 ; 102.997,97.993 SPI1.3@102.997,100.032 ; v2@102.826,97.681 ccw(c102.414,98.094) 102.997,98.094 ; v2@102.826,97.681 ccw(c102.414,98.094) 102.997,98.094 ; v2@102.826,97.681 ccw(c102.414,98.094) 102.997,98.094
  Bottom Layer w0.254: v2(95.225,92.964) 96.037,92.151 96.037,87.274 v2(96.342,86.97) ; v2@95.58,96.799 100.13,96.799 100.308,96.977 102.108,96.977 v2(102.819,97.688) ; 96.058,87.383 ccw(c96.411,87.586) v2@96.366,87.181 ; 96.099,87.312 cw(c95.77,87.123) v2@96.136,87.025 ; 96.15,87.714 cw(c95.585,87.388) v2@96.156,87.073 ; 96.375,87.325 cw(c96.044,87.134) v2@96.378,86.95 ; 99.009,96.799 99.009,97.79 100.14,98.921 ; 95.588,92.6 ccw(c95.225,92.237) 95.225,92.751 cw(c95.225,92.237) 95.588,92.6 ; 95.588,92.6 cw(c95.952,92.964) 95.438,92.964 ccw(c95.952,92.964) 95.588,92.6 ; 102.456,97.325 ccw(c102.092,97.688) v2@102.606,97.688 ; 102.456,97.325 cw(c102.819,96.961) v2@102.819,97.475 ; 102.456,97.325 ccw(c102.092,97.688) v2@102.606,97.688 ; 102.456,97.325 cw(c102.819,96.961) v2@102.819,97.475 ; 102.456,97.325 ccw(c102.092,97.688) v2@102.606,97.688 ; 102.456,97.325 cw(c102.819,96.961) v2@102.819,97.475 ; 96.037,87.606 ccw(c96.979,87.606) 96.313,86.941 cw(c96.979,87.606) 96.037,87.606 ; 96.037,88.22 ccw(c97.592,88.22) 96.493,87.12 cw(c97.592,88.22) 96.037,88.22
  Bottom Layer w0.6: 100.14,98.921 100.14,101.803